# Altium PCB MasterBoardRevC.PcbDoc
Units mm, origin at the board's own origin, x right, y up, seen from the top; angles counter-clockwise.
Board outline 110.13 x 80.67 mm, 4 copper layers (Top Layer, GROUND, POWER, Bottom Layer), stack 0.603 mm thick; 93 components, 61 nets, 312 pads, 60 vias.
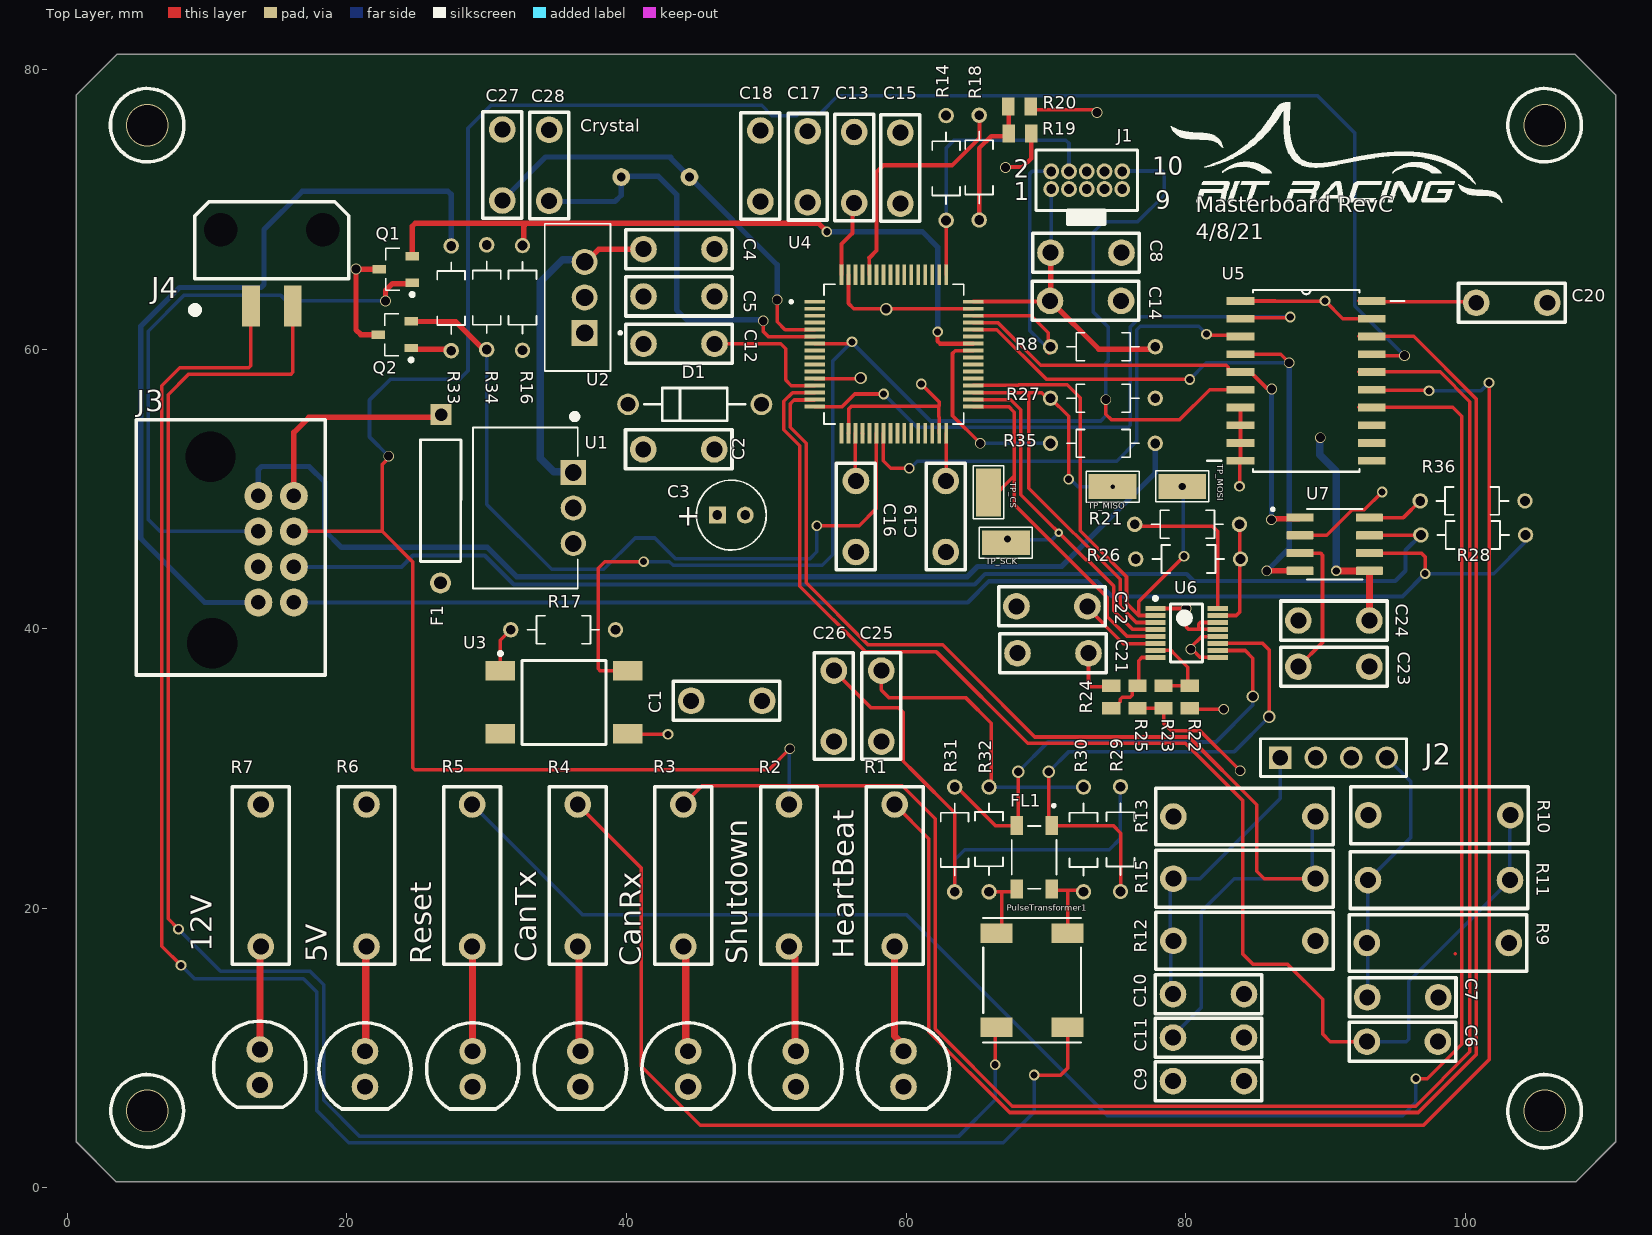
[diagram p0: Top Layer view]
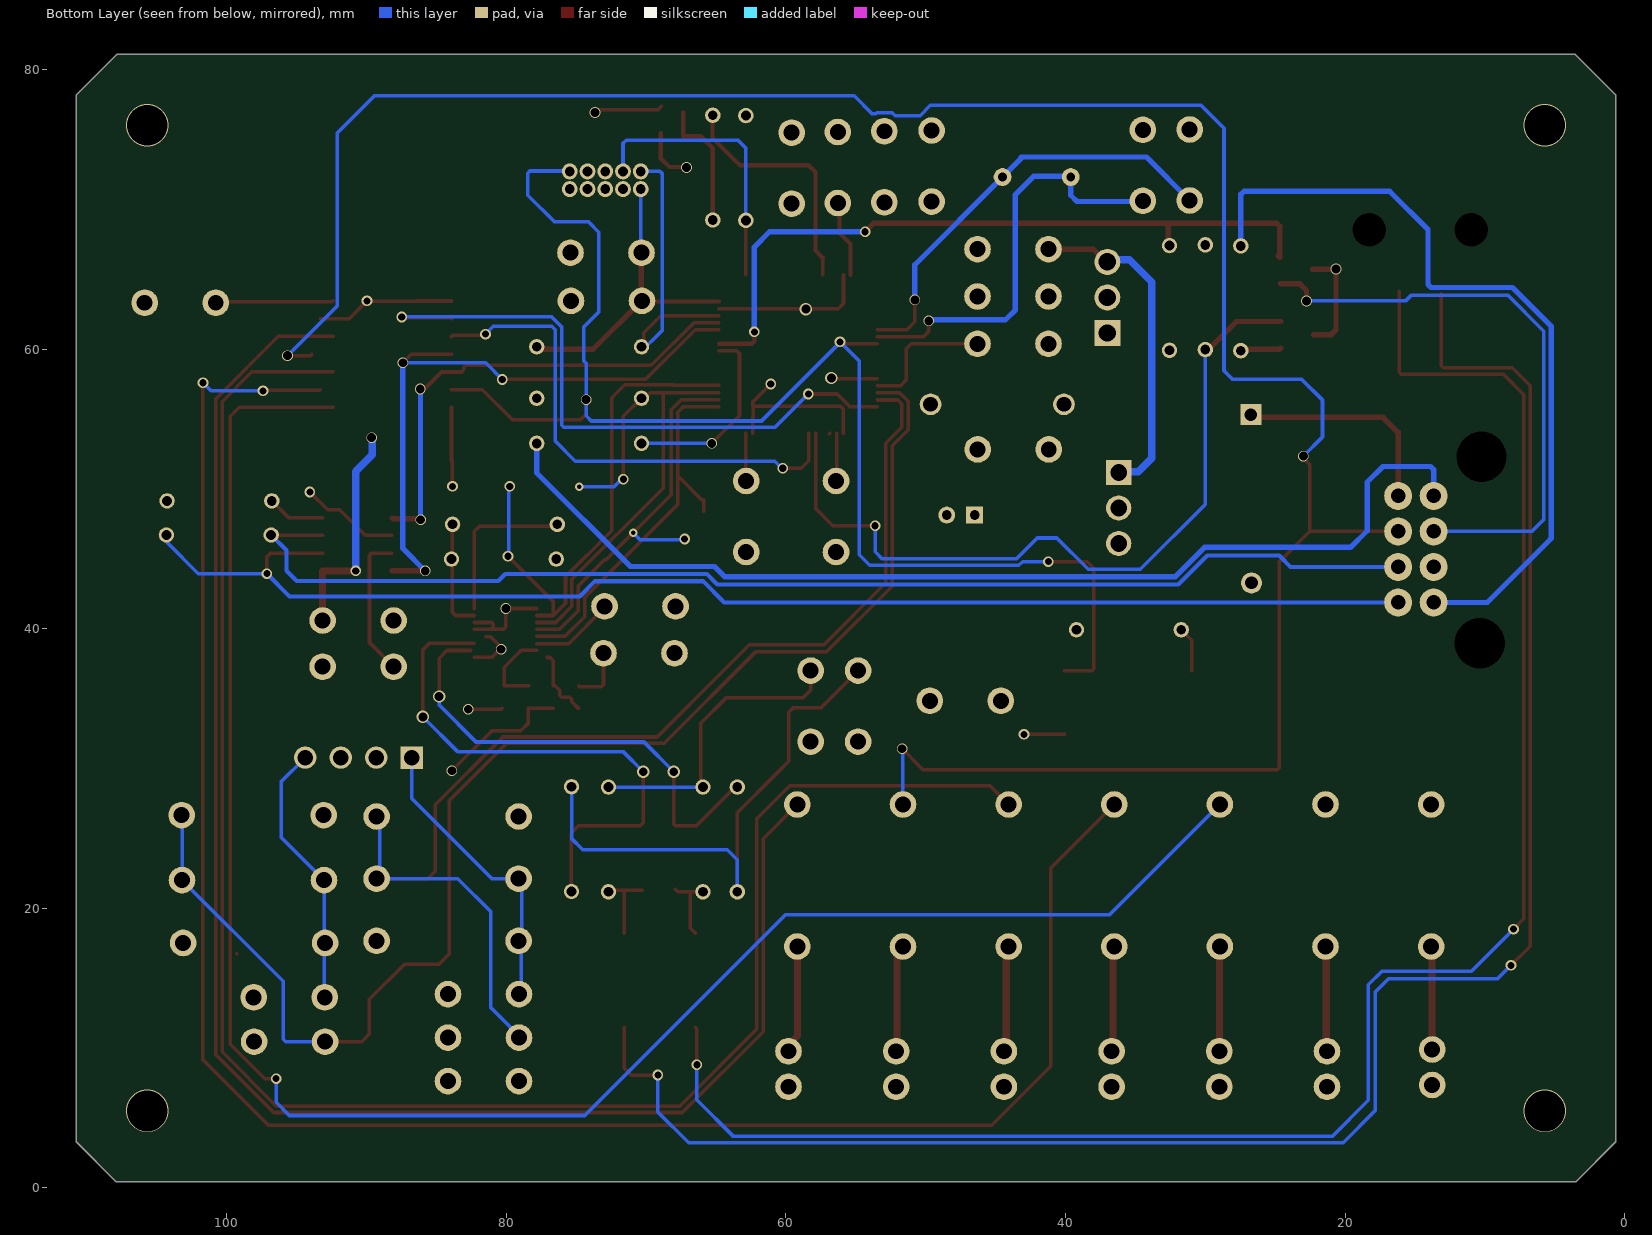
[diagram p1: Bottom Layer view, seen from below]
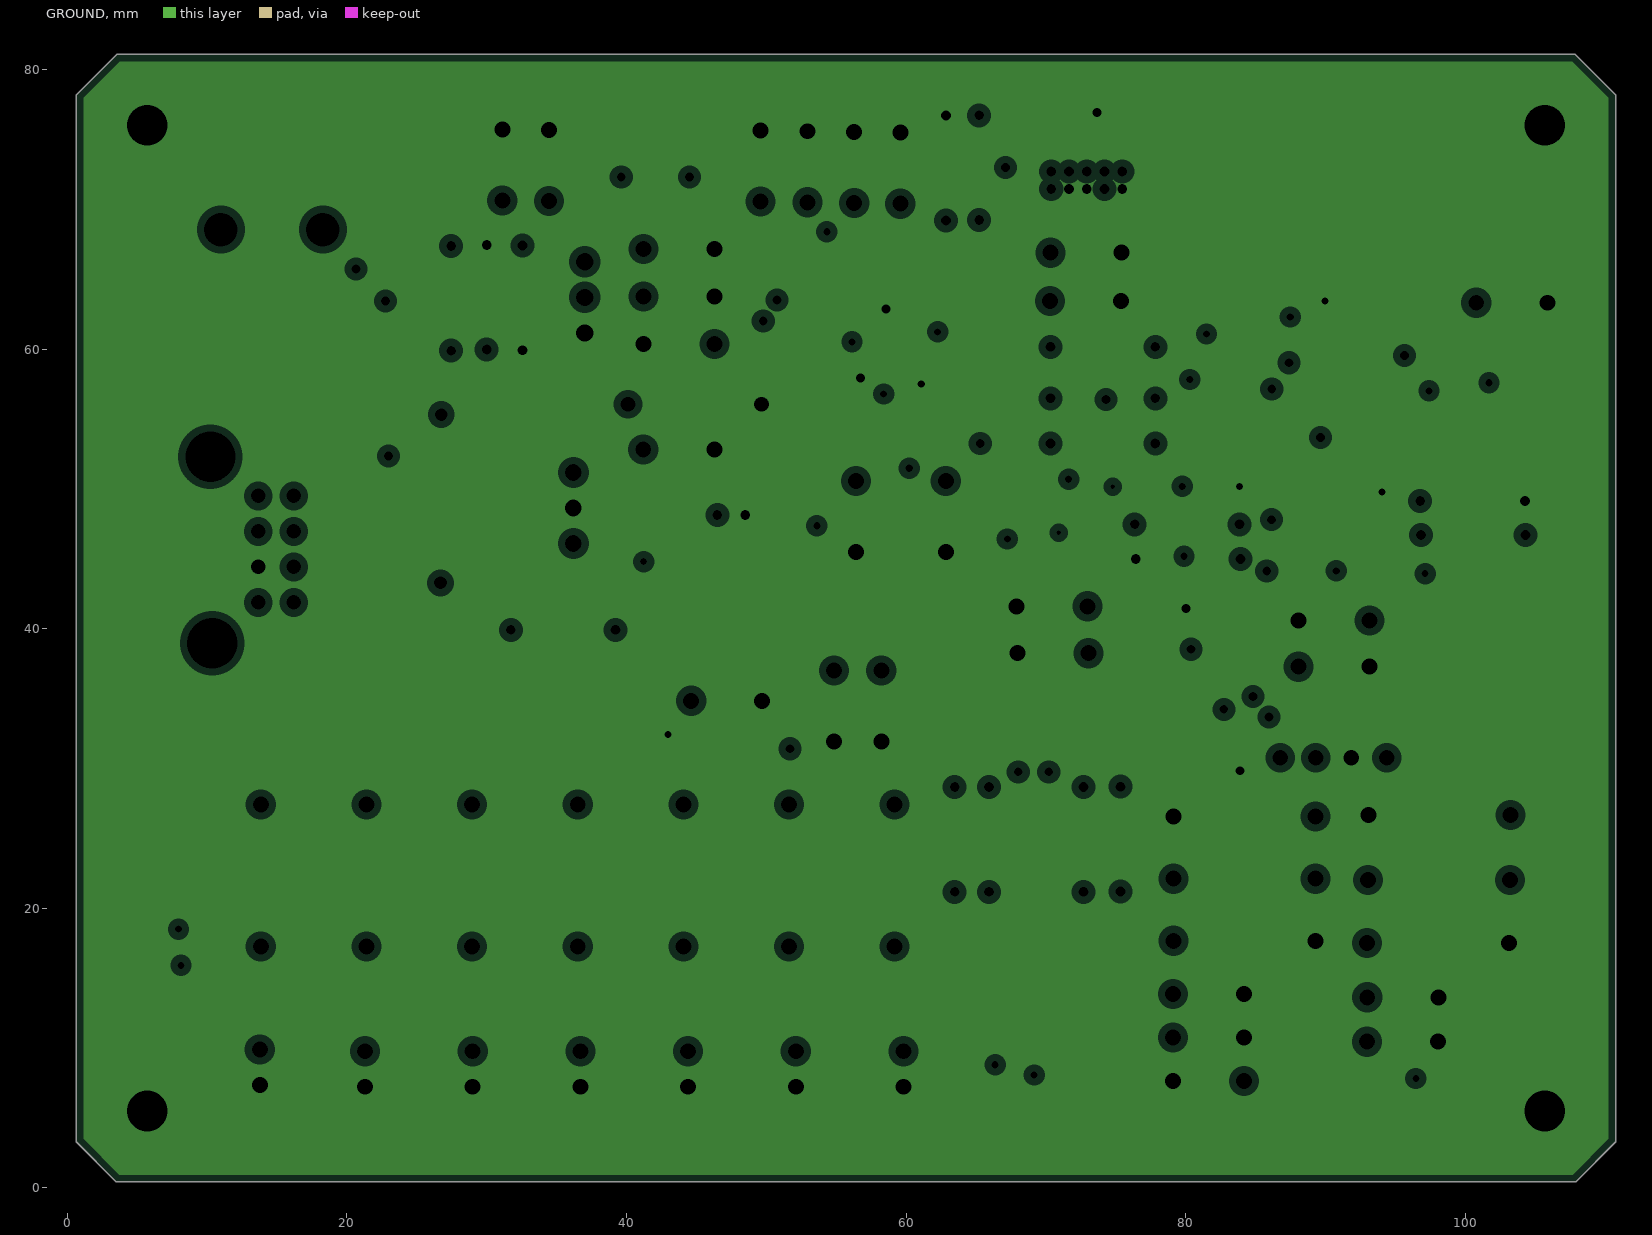
[diagram p2: GROUND, clearances drawn from the general rule]
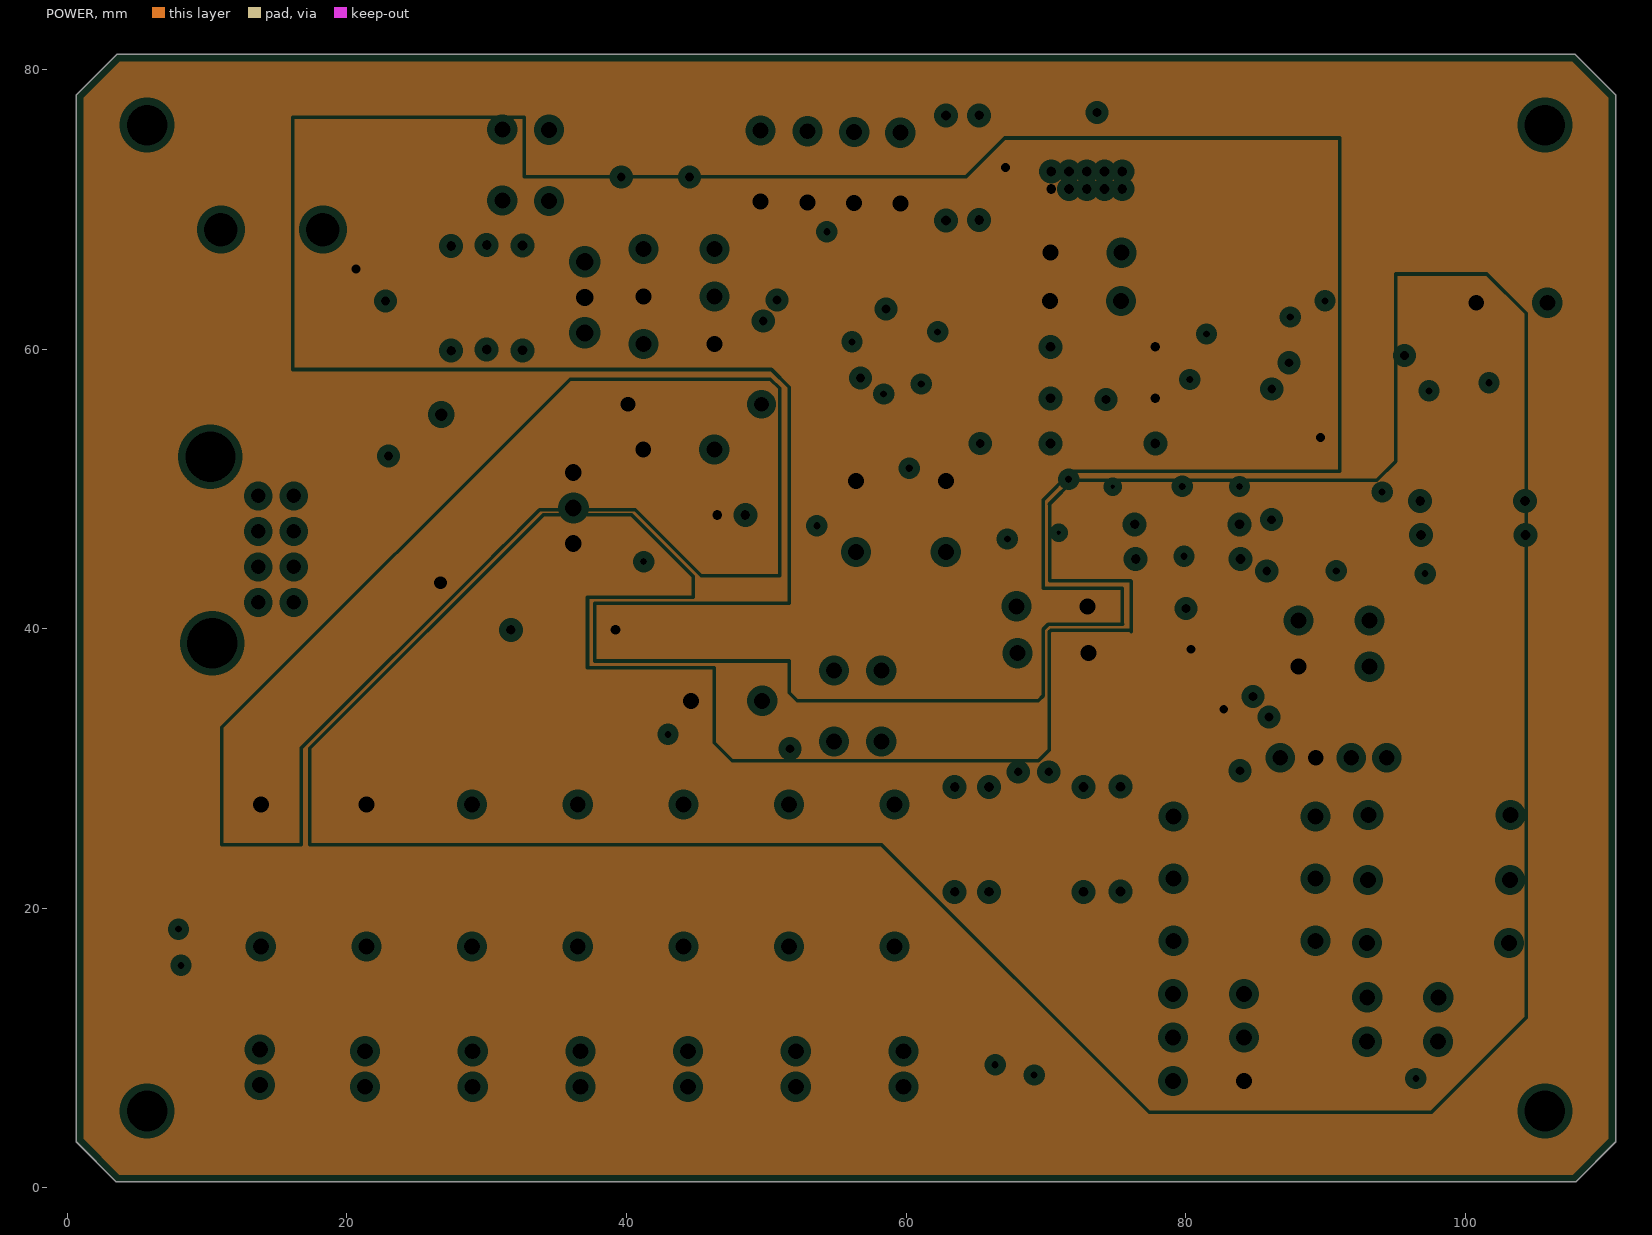
[diagram p3: POWER, clearances drawn from the general rule]

## Layer stack, top to bottom
Top Solder: solder mask 0.0102, Solder Resist, Dk 3.5
Top Layer: signal copper 0.0356
Dielectric 2: prepreg 0.0711, PP-006, Dk 4.1
GROUND: plane copper 0.035, net GND
Dielectric 1: dielectric 0.32, FR-4, Dk 4.8
POWER: plane copper 0.035, net (Multiple Nets)
Dielectric 3: prepreg 0.0711, PP-006, Dk 4.1
Bottom Layer: signal copper 0.0356
Bottom Solder: solder mask 0.0102, Solder Resist, Dk 3.5

## Board outline
0.635,3.302 0.635,78.181 3.556,81.102 107.848,81.102 110.769,78.181 110.769,3.302 107.899,0.432 3.505,0.432

## Design rules (kind name [scope] priority, off if disabled: settings)
Clearance [All] p1: gap=0.2 ignorepadtopadclearanceinfootprint=TRUE except(0.127: Arc-Arc Arc-Track Arc-SMDPad Track-Track Track-SMDPad SMDPad-SMDPad; 0.254: Via-Via)
HoleSize [All] p1: absolutevalues=TRUE maxlimit=5.08 minlimit=0.025 maxpercent=80.000 minpercent=20.000
PlaneClearance [All] p1: clearance=0.508
PlaneConnect [All] p1: planeconnectstyle=Relief reliefexpansion=0.508 reliefentries=4 reliefconductorwidth=0.254 reliefairgap=0.254
PolygonConnect [All] p1: connectstyle=Relief reliefconductorwidth=0.254 reliefentries=4 polygonreliefangle="90 Angle" airgapwidth=0.254
RoutingVias [All] p1: holewidth=0.711 width=1.27 viastyle="Through Hole" minholewidth=0.711 minwidth=1.27 maxholewidth=0.711 maxwidth=1.27
SilkToSilkClearance [All] p1: silktosilkclearance=0.102
SilkToSolderMaskClearance [IsPad] p1: minsilkscreentomaskgap=0.127 clearancetoexposedcopper=TRUE
SolderMaskExpansion [All] p1: expansion=0.102 istentingtop=FALSE
Width [All] p1: maxlimit=0.635 minlimit=0.203 preferedwidth=0.254 minimp=50.000000 maximp=50.000000 favimp=50.000000
25 further rules are at their usual default settings.

## Classes and differential pairs
component class CONNECTORS: C6 C7 C8 C9 C10 C11 J1 J2 J3 J4 Q1 Q2 R8 R9 R10 R11 R12 R13 R14 R15 R16 R17 R33 R34 R35 U3
component class PROCESSOR: C12 C13 C14 C15 C16 C17 C18 C19 C20 C27 C28 Crystal R18 R19 R20 TP_CS TP_MISO TP_MOSI TP_SCK U4 U5
component class POWER: 5V 12V C1 C2 C3 C4 C5 CanRx CanTx D1 F1 HeartBeat R1 R2 R3 R4 R5 R6 R7 Reset Shutdown U1 U2
component class COMMUNICATIONS: C21 C22 C23 C24 C25 C26 FL1 PulseTransformer1 R21 R22 R23 R24 R25 R26 R27 R28 R29 R30 R31 R32 R36 U6 U7

## Components (designator, comment, footprint, x,y, rotation, side; value= is the part's Value field where it differs from the comment)
5V "5V" "LED, TH" 21.294,8.509 r270 top value=Value? (schematic designator D7)
12V "12V_FUSED" "LED, TH" 13.767,8.636 r270 top value=Value? (schematic designator D8)
C1 "10uF" "Cap, 5mm TH, Ceramic" 47.168,34.849 r180 top value=Value?
C2 "10uF" "Cap, 5mm TH, Ceramic" 43.739,52.832 r180 top value=Value?
C3 "10uF" CAPPRD200W50D550H1250 47.498,48.133 r0 top value=Value?
C4 "10uF" "Cap, 5mm TH, Ceramic" 43.755,67.158 r180 top value=Value?
C5 "10uF" "Cap, 5mm TH, Ceramic" 43.755,63.77 r180 top value=Value?
C6 "0.68uF" "Cap, 5mm TH, Ceramic" 95.504,10.465 r0 top value=Value?
C7 "10nF" "Cap, 5mm TH, Ceramic" 95.529,13.64 r0 top value=Value?
C8 "500nF" "Cap, 5mm TH, Ceramic" 72.873,66.904 r180 top value=Value?
C9 "47uF" "Cap, 5mm TH, Ceramic" 81.636,7.645 r0 top value=Value?
C10 "10nF" "Cap, 5mm TH, Ceramic" 81.636,13.868 r180 top value=Value?
C11 "0.68uF" "Cap, 5mm TH, Ceramic" 81.636,10.757 r180 top value=Value?
C12 "100nF" "Cap, 5mm TH, Ceramic" 43.755,60.382 r0 top value=Value?
C13 "100nF" "Cap, 5mm TH, Ceramic" 56.286,73 r270 top value=Value?
C14 "100nF" "Cap, 5mm TH, Ceramic" 72.838,63.455 r180 top value=Value?
C15 "4.7uF" "Cap, 5mm TH, Ceramic" 59.588,72.949 r270 top value=Value?
C16 "10nF" "Cap, 5mm TH, Ceramic" 56.413,48.031 r90 top value=Value?
C17 "1uF" "Cap, 5mm TH, Ceramic" 52.959,73.05 r270 top value=Value?
C18 "4.7uF" "Cap, 5mm TH, Ceramic" 49.581,73.101 r270 top value=Value?
C19 "100nF" "Cap, 5mm TH, Ceramic" 62.84,48.031 r90 top value=Value?
C20 "100nF" "Cap, 5mm TH, Ceramic" 103.327,63.322 r180 top value=Value?
C21 "10nF" "Cap, 5mm TH, Ceramic" 70.51,38.252 r0 top value=Value?
C22 "10nF" "Cap, 5mm TH, Ceramic" 70.434,41.605 r0 top value=Value?
C23 "100nF" "Cap, 5mm TH, Ceramic" 90.602,37.287 r180 top value=Value?
C24 "100nF" "Cap, 5mm TH, Ceramic" 90.602,40.589 r0 top value=Value?
C25 "10nF" "Cap, 5mm TH, Ceramic" 58.229,34.468 r270 top value=Value?
C26 "100nF" "Cap, 5mm TH, Ceramic" 54.839,34.468 r270 top value=Value?
C27 "18pF" "Cap, 5mm TH, Ceramic" 31.115,73.177 r270 top value=Value?
C28 "18pF" "Cap, 5mm TH, Ceramic" 34.468,73.152 r270 top value=Value?
CanRx "CANRX" "LED, TH" 44.408,8.509 r270 top value=Value? (schematic designator D4)
CanTx "CANTX" "LED, TH" 36.703,8.509 r270 top value=Value? (schematic designator D5)
Crystal "48MHz" CrystalOscillator 42.064,72.314 r0 top
D1 "MUR180ERLG" ONSC-AXIAL_LEAD-2-59-10_P 44.882,56.058 r0 top
F1 "2A" "FUSE 20MM" 26.822,49.301 r270 top
FL1 "ACT45B-220-2P-TL003" FIL_ACT45B-220-2P-TL003 69.164,23.647 r270 top
HeartBeat "HRTBT" "LED, TH" 59.817,8.509 r270 top value=Value? (schematic designator D2)
J1 "SAMTEC-FTSH-105-01-X-D" SAMTEC-FTSH-105-01-X-D 72.923,72.085 r0 top
J2 "4pin Header" 61300411121 90.576,30.785 r0 top
J3 "30700-5080" 30700-5080 14.935,45.695 r90 top
J4 "43650-0209" 43650-0209 14.63,68.555 r180 top
PulseTransformer1 "PE-68386NLT" PE-68386NL_PUL 69.012,14.859 r270 top
Q1 "SSM3K329R,LF" SOT23-3 23.495,65.71 r180 top
Q2 "SSM3K329R,LF" SOT23-3 23.419,61.036 r180 top
R1 "Value?" "Resistor, TH" 59.182,22.352 r90 top
R2 "Value?" "Resistor, TH" 51.625,22.352 r90 top
R3 "Value?" "Resistor, TH" 44.069,22.352 r90 top
R4 "Value?" "Resistor, TH" 36.512,22.352 r90 top
R5 "Value?" "Resistor, TH" 28.956,22.352 r90 top
R6 "Value?" "Resistor, TH" 21.399,22.352 r90 top
R7 "Value?" "Resistor, TH" 13.843,22.352 r90 top
R8 "100k" "RESAD640W45L370D200 - duplicate" 74.016,60.173 r0 top value=Value?
R9 "12K" "Resistor, TH" 98.044,17.526 r180 top value=Value?
R10 "3.09K" "Resistor, TH" 98.146,26.67 r0 top value=Value?
R11 "1.60K" "Resistor, TH" 98.12,22.022 r180 top value=Value?
R12 "12K" "Resistor, TH" 84.201,17.678 r0 top value=Value?
R13 "3.09K" "Resistor, TH" 84.201,26.568 r180 top value=Value?
R14 "100k" "RESAD640W45L370D200 - duplicate" 62.865,73.025 r270 top value=Value?
R15 "1.60k" "Resistor, TH" 84.201,22.123 r180 top value=Value?
R16 "10k" "1/4W TH Resistor" 32.563,63.602 r90 top value=Value?
R17 "10k" "RESAD640W45L370D200 - duplicate" 35.408,39.929 r0 top value=Value?
R18 "2k" "1/4W TH Resistor" 65.227,72.923 r90 top value=Value?
R19 "0805 jumper" RESC2013X60X35LL20T20 68.148,75.438 r0 top
R20 "0805 jumper" RESC2013X60X35LL20T20 68.123,77.368 r180 top
R21 "806r .1%" "1/4W TH Resistor" 80.035,47.473 r0 top value=Value?
R22 "0805 jumper" RESC2013X60X35LL20T20 80.289,35.128 r270 top
R23 "0805 jumper" RESC2013X60X35LL20T20 78.418,35.128 r270 top
R24 "0805 jumper" RESC2013X60X35LL20T20 74.676,35.128 r90 top
R25 "0805 jumper" RESC2013X60X35LL20T20 76.547,35.128 r270 top
R26 "1.21k .1%" "1/4W TH Resistor" 80.112,44.983 r0 top value=Value?
R27 "2k" "1/4W TH Resistor" 74.016,56.49 r0 top value=Value?
R28 "120r" "RESAD640W45L370D200 - duplicate" 100.635,46.711 r180 top value=Value?
R29 "62r" "RESAD640W45L370D200 - duplicate" 75.336,25.019 r270 top value=Value?
R30 "300r" "RESAD640W45L370D200 - duplicate" 72.695,24.994 r270 top value=Value?
R31 "62r" "RESAD640W45L370D200 - duplicate" 63.475,24.994 r270 top value=Value?
R32 "300r" "RESAD640W45L370D200 - duplicate" 65.938,24.867 r90 top value=Value?
R33 "160r" "1/4W TH Resistor" 27.457,63.576 r90 top value=Value?
R34 "10K" "1/4W TH Resistor" 29.997,63.779 r270 top value=Value?
R35 "160r" "1/4W TH Resistor" 74.016,53.264 r0 top value=Value?
R36 "10k" "1/4W TH Resistor" 100.584,49.149 r180 top value=Value?
Reset "RESET" "LED, TH" 28.998,8.509 r270 top value=Value? (schematic designator D6)
Shutdown "SHUTDOWN" "LED, TH" 52.112,8.509 r270 top value=Value? (schematic designator D3)
TP_CS "5015" 5015 65.888,49.759 r90 top
TP_MISO "5015" 5015 74.778,50.165 r180 top
TP_MOSI "5015" 5015 79.756,50.19 r180 top
TP_SCK "5015" 5015 67.132,46.152 r180 top
U1 "VXO7805-1000" CONV_VXO7805-1000 36.195,51.181 r270 top
U2 "LM1117T-3.3" TO254P1054X470X1955-3 37.008,63.703 r90 top
U3 "Reset Button" TECO-FSM4JSMA_V 35.531,34.732 r90 top
U4 "STM32F091RCT6" *QFP50P1200X1200X160-64N 59.122,59.645 r0 top
U5 "74ACT541SC" SOIC127P1032X265-20N 88.621,57.734 r0 top
U6 "LTC6820IMS#TRPBF" TSSOP50P490X110-16N 80.061,39.7 r0 top
U7 "NXP CAN Transceiver" "NXP CAN Tranceiver" 90.662,46.05 r0 top

## Footprints (in the part's own frame and the unit in brackets; to place one, negate y for a bottom-side part, rotate by r counter-clockwise, add the part's x,y. Pads: shape width x height; smd on the part's side, far side on the other; paste and mask are expansions set on the pad)
"1/4W TH Resistor" [mm] "Axial Through Hole Resistor"
  round 1.1 hole 0.7: 1(-3.683,0) 2(3.81,0)
  silkscreen extent -2.5,-1 2.65,1, body extent -3.92,-1.12 3.98,1.03, height 2.17
5015 [mm] "SMD Test Point"
  rect 3.43x1.78 smd: 1(0,0)
  silkscreen extent -1.9,-1.1 1.9,1.1, body extent -1.27,-0.51 1.4,0.51, height 1.52
30700-5080 [mm]
  round 2 hole 1.04: 1(3.81,-1.27) 2(1.27,-1.27) 3(-1.27,-1.27) 4(-3.81,-1.27) 5(3.81,1.27) 6(1.27,1.27) 7(-1.27,1.27) 8(-3.81,1.27)
  round 0 hole 3.6 unplated: ""(-6.731,4.572)
  round 3 hole 3.6 unplated: ""(6.604,4.699)
  silkscreen extent -9,-3.5 9.25,10, body extent -9.1,-9.96 9.05,8.84, height 22.04
43650-0209 [mm] "Molex 2 Position Board Header, Right Angle"
  rect 1.27x2.92 smd: 1(1.5,5.47) 2(-1.5,5.47)
  round 0 hole 2.41 unplated: ""(-3.65,0) ""(3.65,0)
  silkscreen extent -5.5,-2 5.7,5.95, body extent -4.82,-4.6 4.83,6.14, height 5.64
61300411121 [mm]
  rect 1.6x1.6 hole 1.1: 1(-3.81,0)
  round 1.6 hole 1.1: 2(-1.27,0) 3(1.27,0) 4(3.81,0)
  silkscreen extent -5.23,-1.35 5.23,1.35, body extent -5.08,-1.27 5.08,1.27, height 8.57
*QFP50P1200X1200X160-64N [mm]
  rect 1.47x0.28 smd: 1(-5.67,3.75) 2(-5.67,3.25) 3(-5.67,2.75) 4(-5.67,2.25) 5(-5.67,1.75) 6(-5.67,1.25) 7(-5.67,0.75) 8(-5.67,0.25) 9(-5.67,-0.25) 10(-5.67,-0.75) 11(-5.67,-1.25) 12(-5.67,-1.75) 13(-5.67,-2.25) 14(-5.67,-2.75) 15(-5.67,-3.25) 16(-5.67,-3.75) 33(5.67,-3.75) 34(5.67,-3.25) 35(5.67,-2.75) 36(5.67,-2.25) 37(5.67,-1.75) 38(5.67,-1.25) 39(5.67,-0.75) 40(5.67,-0.25) 41(5.67,0.25) 42(5.67,0.75) 43(5.67,1.25) 44(5.67,1.75) 45(5.67,2.25) 46(5.67,2.75) 47(5.67,3.25) 48(5.67,3.75)
  rect 0.28x1.47 smd: 17(-3.75,-5.67) 18(-3.25,-5.67) 19(-2.75,-5.67) 20(-2.25,-5.67) 21(-1.75,-5.67) 22(-1.25,-5.67) 23(-0.75,-5.67) 24(-0.25,-5.67) 25(0.25,-5.67) 26(0.75,-5.67) 27(1.25,-5.67) 28(1.75,-5.67) 29(2.25,-5.67) 30(2.75,-5.67) 31(3.25,-5.67) 32(3.75,-5.67) 49(3.75,5.67) 50(3.25,5.67) 51(2.75,5.67) 52(2.25,5.67) 53(1.75,5.67) 54(1.25,5.67) 55(0.75,5.67) 56(0.25,5.67) 57(-0.25,5.67) 58(-0.75,5.67) 59(-1.25,5.67) 60(-1.75,5.67) 61(-2.25,5.67) 62(-2.75,5.67) 63(-3.25,5.67) 64(-3.75,5.67)
  silkscreen extent -7.44,-5 5,5, body extent -6,-6 6,6, height 1.56
"Cap, 5mm TH, Ceramic" [mil] "Through Hole Cap, Ceramic"
  round 75 hole 45: 1(-100,0) 2(100,0)
  silkscreen extent -150,-55 150,55, body extent -109,-59 109,59, height 176
CAPPRD200W50D550H1250 [mm]
  rect 1.208x1.208 hole 0.7: 1(-1,0)
  round 1.208 hole 0.7: 2(1,0)
  silkscreen extent -2.5,-2.5 2.5,2.5, body extent -2.65,-2.72 2.61,2.52, height 11.01
CONV_VXO7805-1000 [mm]
  rect 1.8x1.8 hole 1.2: 1(0,0)
  round 1.8 hole 1.2: 2(2.54,0) 3(5.08,0)
  silkscreen extent -4.2,-7.18 8.29,0.32, body extent -3.12,-6.76 8.38,0.32, height 17.5
CrystalOscillator [mm]
  round 1.27 hole 0.635: 1(-2.44,0) 2(2.44,0)
  body extent -5.55,-2.32 5.5,2.33, height 3.5
FIL_ACT45B-220-2P-TL003 [mm]
  rect 1.35x0.9 smd: 1(-2.275,1.25) 2(-2.275,-1.25) 3(2.275,-1.25) 4(2.275,1.25)
  silkscreen extent -3.8,-1.6 2.25,1.6
"FUSE 20MM" [mm]
  rect 1.5x1.5 hole 0.9: 1(-6.02,-0.076)
  round 1.5 hole 0.9: 2(6.02,-0.127)
  silkscreen extent -4.22,-1.58 4.5,1.35
"LED, TH" [mil] "Through Hole LED"
  round 75 hole 45: 1(-50,0) 2(50,0)
  silkscreen extent -130,-130 113,130, body extent -118,-118 98,118, height 346
"NXP CAN Tranceiver" [mm]
  rrect25% 1.95x0.59 smd: 1(-2.48,1.905) 2(-2.48,0.635) 3(-2.48,-0.635) 4(-2.48,-1.905) 5(2.48,-1.905) 6(2.48,-0.635) 7(2.48,0.635) 8(2.48,1.905)
  silkscreen extent -4.53,-2.52 2,2.59, body extent -2.87,-2.45 3.13,2.45, height 1.75
ONSC-AXIAL_LEAD-2-59-10_P [mm] "AXIAL, 2-Leads, Diameter 2.35mm"
  round 1.55 hole 1.05: 1(-4.77,0) 2(4.77,0)
  silkscreen extent -3.59,-1.17 3.59,1.17
PE-68386NL_PUL [mil]
  rect 55x90 smd: 1(-132.5,100) 2(-132.5,-100) 3(132.5,-100) 4(132.5,100)
  silkscreen extent -175,-138 175,138, body extent 0,0 10,10, height 10
"RESAD640W45L370D200 - duplicate" [mm] "Axial Through Hole Resistor"
  round 1.1 hole 0.7: 1(-3.683,0) 2(3.81,0)
  silkscreen extent -2.5,-1 2.65,1, body extent -3.92,-1.12 3.98,1.03, height 2.17
RESC2013X60X35LL20T20 [mm] "Chip Resistor, 2-Leads, Body 2.2x1.4mm, IPC High Density"
  rect 0.9x1.3 smd: 1(-0.8,0) 2(0.8,0)
  body extent -1.1,-0.7 1.1,0.7, height 0.6
"Resistor, TH" [mil] "Axial Through Hole Resistor"
  round 75 hole 45: 1(-200,0) 2(200,0)
  silkscreen extent -250,-80 250,80, body extent -211,-51 211,51, height 106
SAMTEC-FTSH-105-01-X-D [mil]
  round 45 hole 27.95: 1(-100,-25) 2(-100,25) 3(-50,-25) 4(-50,25) 5(0,-25) 6(0,25) 7(50,-25) 8(50,25) 9(100,-25) 10(100,25)
  silkscreen extent -143,-85 143,85, body extent -125,-67 125,68, height 219
SOIC127P1032X265-20N [mil]
  rect 78x22 smd: 1(-185,225) 2(-185,175) 3(-185,125) 4(-185,75) 5(-185,25) 6(-185,-25) 7(-185,-75) 8(-185,-125) 9(-185,-175) 10(-185,-225) 11(185,-225) 12(185,-175) 13(185,-125) 14(185,-75) 15(185,-25) 16(185,25) 17(185,75) 18(185,125) 19(185,175) 20(185,225)
  silkscreen extent -279,-256 277,256
SOT23-3 [mm] "SOT23, 3-Leads, Body 2.90x2.40mm, Pitch 0.95mm, IPC Medium Density"
  rect 0.95x0.6 smd: 1(-1.175,0.95) 2(-1.175,-0.95) 3(1.175,0)
  silkscreen extent -1.3,-1.5 0.7,1.92, body extent -1.42,-1.5 1.42,1.5, height 1.2
TECO-FSM4JSMA_V [mm] "SMD, 4-Leads, Body 6x6mm, Pitch 4.5mm"
  rect 1.4x2.1 smd: 1(2.25,4.55) 2(2.25,-4.55) 3(-2.25,4.55) 4(-2.25,-4.55)
  silkscreen extent -3,-3 3.62,4.67, body extent -3,-5 3,5, height 5.08
TO254P1054X470X1955-3 [mm]
  rect 1.86x1.86 hole 1.24: 1(-2.54,0)
  round 1.86 hole 1.24: 2(0,0) 3(2.54,0)
  silkscreen extent -5.27,-2.64 5.27,2.86
TSSOP50P490X110-16N [mm] "TSSOP, 16-Leads, Body 3.77x3.00mm, Pitch 0.50mm, IPC Medium Density"
  rect 1.45x0.35 smd: 1(-2.225,1.75) 2(-2.225,1.25) 3(-2.225,0.75) 4(-2.225,0.25) 5(-2.225,-0.25) 6(-2.225,-0.75) 7(-2.225,-1.25) 8(-2.225,-1.75) 9(2.225,-1.75) 10(2.225,-1.25) 11(2.225,-0.75) 12(2.225,-0.25) 13(2.225,0.25) 14(2.225,0.75) 15(2.225,1.25) 16(2.225,1.75)
  silkscreen extent -2.35,-2.08 1.15,2.6, body extent -1.55,-2.05 1.55,2.05, height 1.1

## Part data
5V 12V CanRx CanTx HeartBeat Reset Shutdown: library part "LED, TH", "LED, 5mm, TH", Published=22Oct2016, Publisher=T.Tallo, Status=Active, TargetLibrary=RITRacing-LED's
C1 C2 C4 C5 C6 C7 C8 C9 C10 C11 C12 C13 C14 C15 C16 C17 C18 C19 C20 C21 C22 C23 C24 C25 C26 C27 C28: library part "Cap, 5MM TH, Ceramic", "Generic Cap, 5MM TH, Ceramic", Published=22Oct2016, Publisher=T.Tallo, Status=Active, TargetLibrary=RITRacing-Passives
C3: library part "Cap, TH, Electrolytic_5mm", "Generic Cap, TH, Electrolytic", Published=22Oct2016, Publisher=T.Tallo, Status=Active, TargetLibrary=RITRacing-Passives
Crystal: library part CrystalOscillator
D1: library part CMP-0902-00111-1, "SWITCHMODE(TM) Power Rectifier, Ultrafast 'E' Series with High Reverse Energy Capability, 2-Pin Axial_Lead, Pb-Free, Tape and Reel", Manufacturer="On Semiconductor", ComponentLink1Description="Manufacturer URL", ComponentLink1URL=http://www.onsemi.com/, ComponentLink2Description=Datasheet, ComponentLink2URL=http://www.onsemi.cn/pub_link/Collateral/MUR180E-D.PDF, ComponentLink3Description="Package Specification", ComponentLink3URL=http://www.onsemi.cn/pub_link/Collateral/59-10.PDF, DatasheetVersion="Rev. 4", IFSM Max (A)=35, Mounting Technology="Through Hole", PackageDescription="2-Pin, Axial Lead, Diameter 2.35 mm", PackageReference=AXIAL_LEAD-2-59-10, PackageVersion="Rev. U, 02/2005", Packing="Tape and Reel", PartNumber=MUR180ERLG, RoHS=TRUE, Type=Ultrafast
F1: library part "Fuse 2", "Fuse", LatestRevisionDate=17-Jul-2002, LatestRevisionNote="Re-released for DXP Platform.", PackageDescription="Thru-Hole; 2 Leads", PackageReference=PIN-W2/E2.8, Published=8-Jun-2000, Publisher="Altium Limited"
FL1: "100ÂµH @ 100kHz 2 Line Common Mode Choke Surface Mount 5.8 kOhms @ 10MHz 150mA DCR 2Ohm", Package=None, Availability=Unavailable, MP=ACT45B-220-2P-TL003, Price=None
J1: "Connector Header Through Hole 10 position 0.050\" _1.27mm_", Package=None, Availability=Unavailable, MF=Samtec, MP=FTSH-105-01-F-D, Price=None, SnapEDA_Link=https://www.snapeda.com/parts/FTSH-105-01-F-D/Samtec%20Inc./view-part/105348/?ref=snap
J2: library part CMP-1502-01064-1, "THT Vertical Pin Header WR-PHD, Pitch 2.54 mm, Single Row, 4 pins", Contact Resistance=20mOhm, Manufacturer="Wurth Elektronik", Manufacturer Part Number=61300411121, Operating Temperature=-40to105degC, Rated Current=3A, Withstanding Voltage=500VAC, Working Voltage=250VAC, Datasheet URL=https://katalog.we-online.de/em/datasheet/6130xx11121.pdf, Gender=Male, Manufacturer URL=http://www.we-online.de, Mounting Technology=THT, Orientation=Vertical, Package Reference=61300411121, Packaging=Bag, Part Number=61300411121, Pin Number=4, Pitch=2.54mm, Publisher=WurthElektronik, Row Number=Single
J3: "Molex 8 Position High Density Board Header", Manufacturer=Molex, ComponentLink1Description=Datasheet, ComponentLink1URL=http://www.molex.com/molex/products/datasheet.jsp?part=active/0307004081_PCB_HEADERS.xml, PartNumber=30700-5080, Published=22Oct2016, Publisher=T.Tallo, Status=Active, TargetLibrary=RITRacing-Connectors
J4: "Molex 2 Position Board Header, RIght Angle", Manufacturer=Molex, Voltage=600V, ComponentLink1Description=Datasheet, ComponentLink1URL=http://www.mouser.com/ds/2/418/NG_CD_1445088_A1-614413.pdf, PartNumber=43650-0209, Published=13Aug2018, Publisher=T.Tallo, Status=Active, TargetLibrary=RITRacing-Connectors
PulseTransformer1: "No Description Available", Built_By=EMA_Cory, Copyright="Copyright (C) 2018 Accelerated Designs. All rights reserved", Manufacturer_Part_Number=PE-68386NLT, RefDes=RefDes, SourceLibrary=Pulse_Electronics_2019-12-18, Type=DEV, Vendor="Pulse Electronics Corporation"
Q1 Q2: "N-Channel MOSFET, 30V, 3.5A", Manufacturer=Toshiba, ComponentLink1Description=Datasheet, ComponentLink1URL="See Digikey", PartNumber=SSM3K329R,LF, Published=09/27/2017, Publisher=T.Tallo, Status=Active, TargetLibrary=RITRacing-Transistors
R1 R2 R3 R4 R5 R6 R7 R8 R9 R10 R11 R12 R13 R14 R15 R16 R17 R18 R21 R26 R27 R28 R29 R30 R31 R32 R33 R34 R35 R36: library part "Resistor, TH", "Generic TH Resistor", Published=22Oct2016, Publisher=T.Tallo, Status=Active, TargetLibrary=RITRacing-Passives
R19 R20 R22 R23 R24 R25: library part CMP-2000-06973-1, "Chip Resistor, 0 Ohm, +/- 5%, 0.125 W, -55 to 155 degC, 0805 (2012 Metric) , RoHS, Tape and Reel", Manufacturer="Samsung Electro-Mechanics", Package Description="2-Pin Chip Resistor, Body 2 x 1.25 mm", Package Reference=0805, Rated Power=0.125W, Resistance=0O, Temp Coefficient=±200ppm/°C, Tolerance (%)=±5%, Datasheet URL=https://datasheet.ciiva.com/15196/getdatasheetpartid-499011-15196236.pdf, Datasheet Version=11/2010, Manufacturer URL=http://www.samsungsem.com/global/index.jsp, Mounting Technology=SurfaceMount, Size Code=0805
TP_CS TP_MISO TP_MOSI TP_SCK: "SMD Test Point", Manufacturer="Keystone Electronics", ComponentLink1Description=Datasheet, ComponentLink1URL=http://www.mouser.com/ds/2/215/005-5009-743680.pdf, PartNumber=5015, Published=22Oct2016, Publisher=T.Tallo, Status=Active, TargetLibrary=RITRacing-Connectors
U2: "800-mA 15-V linear voltage regulator 3-TO-220 0 to 125", Package="TO-220-3 Texas Instruments", Arrow_Electronics-Purchase-URL=https://snapeda.com/shop?store=Arrow+Electronics&id=22275, Availability=https://www.mouser.com/ProductDetail/Texas-Instruments/LM1117T-33-NOPB?qs=X1J7HmVL2ZF7RIQB6O0mNg%3D%3D&gclid=Cj0KCQjwvvj5BRDkARIsAGD9vlJnD1MNOYBTPv7FHDAskkwDQ_PuLBSV-edvQAne3qvGjGEuZX3qJSwaAtIgEALw_wcB, DigiKey-Purchase-URL=https://snapeda.com/shop?store=DigiKey&id=22275, MF="Texas Instruments", Mouser-Purchase-URL=https://snapeda.com/shop?store=Mouser&id=22275, MP=LM1117T-3.3/NOPB, Price=None, SnapEDA_Link=https://www.snapeda.com/parts/LM1117T-3.3/NOPB/Texas%20Instruments/view-part/22275/?ref=snap, Texas_Instruments-Purchase-URL=https://snapeda.com/shop?store=Texas+Instruments&id=22275
U3: library part CMP-2000-07488-1, "Swicth, SPST, 24 V, -35 to 85 degC, 4-Pin SMD, RoHS, Tape and Reel", Case\/Package=SMD/SMT, Contact Current Rating=50mA, Contact Resistance=100mOhm, Manufacturer="TE Connectivity", Max Operating Temperature=85degC, Max Voltage Rating (DC)=12V, Min Operating Temperature=-35degC, Operating Force=1.57N, Package Description="4-Pin Surface Mount Device, Body 6 x 6 mm, Pitch 4.5 mm", Package Quantity=750, Package Reference=FSM4JSMA, Voltage Rating=24V, Actuator Length=0.055inch, Actuator Material=Polyamide, Contact Material=CopperAlloy, Contact Plating=Silver, Current Rating=50mA, Datasheet URL=http://www.te.com/commerce/DocumentDelivery/DDEController?Action=showdoc&DocId=Customer+Drawing%7F2-1437565-7%7FV%7Fpdf%7FEnglish%7FENG_CD_2-1437565-7_V.pdf%7F4-1437565-2, Datasheet Version="Rev. V, 02/2015", Electrical Life=100000Cycles, Illumination Type=Illuminated, Length=6mm, Manufacturer URL=http://www.te.com/, Mechanical Life=100000Cycles, Mount=SurfaceMount, Mounting Technology=SurfaceMount, Orientation=Straight, Packaging=LoosePiece, REACH SVHC=Unknown, RoHSCompliant=true, Switch Travel=0.25mm, Termination=GullWing, Throw Configuration=SPST, Voltage Rating (DC)=24V, Width=6mm
U4: library part CMP-12105-000069-1, "IC MCU 32BIT 256KB FLASH 64LQFP", Ambient Temperature Range High=+85°C, Ambient Temperature Range Low=-40°C, Frequency=48MHz, Manufacturer=STMicroelectronics, Max Junction Temp=+105°C, Max Supply Voltage=3.6V, Min Supply Voltage=2V, Nominal Supply Current=0.9-26.9mA, Package=LQFP64-5W, Temperature="-40°C to +85°C", Automotive=No, Category=IC, ComponentLink2Description=Datasheet, ComponentLink2URL=https://www.st.com/resource/en/datasheet/stm32f091rc.pdf, Core Architecture="ARM Cortex-M0", Data Bus Width=32bits, Device Class L1="Integrated Circuits (ICs)", Device Class L2="Embedded Processors and Controllers", Device Class L3=Microcontrollers, Digikey Description="IC MCU 32BIT 256KB FLASH 64LQFP", Height=1.6mm, Interface=I2C,SPI,USART,CAN,LIN,IrDA,I2S,SMBus, Ipc Land Pattern Name=QFP50P1200X1200X160-64, Lead Free=Yes, Manufacturer Part Number=STM32F091RCT6, Memory Size=256KBytes, Memory Type=FLASH, Mouser Description="ARM Microcontrollers - MCU 16/32-BITS MICROS", Number Of A/D Converters=1, Number Of Adc Channels=19, Number Of Cores=1, Number Of I2C Channels=2, Number Of I/Os=52, Number Of Pwm Channels=6, Number Of Spi Channels=2, Number Of Timers/Counters=10, Number Of Uart Channels=8, Octopart=https://octopart.com/stm32f091rct6-stmicroelectronics-51988683, Ram Size=32KBytes, RoHS=TRUE, Standoff Height=0.05mm, Temperature Range High=+85°C, Temperature Range Low=-40°C
U5: "Buffer, Non-Inverting 1 Element 8 Bit per Element 3-State Output 20-SOIC", Package="SOIC-20 Fairchild Semiconductor", Arrow_Electronics-Purchase-URL=https://snapeda.com/shop?store=Arrow+Electronics&id=431052, Availability=Warning, DigiKey-Purchase-URL=https://snapeda.com/shop?store=DigiKey&id=431052, MF="ON Semiconductor", Mouser-Purchase-URL=https://snapeda.com/shop?store=Mouser&id=431052, MP=74ACT541SC, Price=None, SnapEDA_Link=https://www.snapeda.com/parts/74ACT541SC/ON%20Semiconductor/view-part/431052/?ref=snap
U6: library part CMP-0937-00011-1, "IsoSPI Isolated Communication Interface, 2.7 to 5.5 V, -40 to 85 degC, 16-Pin MSOP (MS), Pb-Free, Tape and Reel", IO Supply Current="1 uA Max.", IO Supply Voltage Range="1.7 to 5.5 V", Manufacturer="Linear Technology", Power Supply="2.7 to 5.5 V", Receiver Input Resistance="35 kOhm", Supply Current, IDLE State="2 uA", Temperature Range (degC)="-40 to 85", ComponentLink1Description="Manufacturer URL", ComponentLink1URL=http://www.linear.com/, ComponentLink2Description=Datasheet, ComponentLink2URL=http://cds.linear.com/docs/en/datasheet/6820fa.pdf, ComponentLink3Description="Package Specification", ComponentLink3URL=http://cds.linear.com/docs/en/packaging/05081669_A_MS16.pdf, DatasheetVersion="Rev. A", Manufacturer Part Number=LTC6820IMS#TRPBF, Mounting Technology="Surface Mount", PackageDescription="16-Pin Micro Small Outline Package, Body 4.039 x 3 mm, Pitch 0.5 mm", PackageReference=MS-16, PackageVersion="Rev. A", Packing="Tape and Reel", PartNumber=LTC6820IMS#TRPBF, VBIAS="1.9 to 2.1 V"

## Via types
v1: diameter 0.762, hole 0.508, Top Layer to Bottom Layer, 28 vias
v2: diameter 0.762, hole 0.635, Top Layer to Bottom Layer, 20 vias
v3: diameter 0.889, hole 0.635, Top Layer to Bottom Layer, 6 vias
v4: diameter 3.048, hole 2.921, Top Layer to Bottom Layer, 4 vias
v5: diameter 0.61, hole 0.305, Top Layer to Bottom Layer, 2 vias

## Nets (pads, with @x,y where several pads share a name; then routed paths per layer and width w, separated by ;. In a path a pad name is that pad's centre, name@x,y a point inside that pad or via, vN(x,y) a via of type N, cw(c..) or ccw(c..) an arc to the next point about the centre after c; other vN are vias at no path point)
12V_Fused: C2.2 C3.1 C4.2 D1.1 F1.2 R7.2 U1.1 U2.3 | length 24.1
  Top Layer w0.381: U2.3@37.236,66.37 38.024,67.158 C4.2 ; D1.1@39.934,56.236 D1.1 ; C2.2@41.148,52.781 C2.2
  Bottom Layer w0.508: U1.1@36.195,51.232 34.798,51.232 33.833,52.197 33.833,64.803 35.426,66.396 37.211,66.396 U2.3@37.236,66.37
AIR_Open_Sig: J3.6 Q1.1 | length 42.8
  Top Layer w0.254: Q1.1@24.599,64.689 Q1.1
  Top Layer w0.381: v2(22.758,63.449) 22.758,64.186 23.261,64.689 Q1.1@24.599,64.689
  Bottom Layer w0.254: J3.6 6.629,46.965 5.779,47.816 5.779,61.281 8.34,63.843 15.284,63.843 15.677,63.449 v2(22.758,63.449)
AIRS_Signal_NMOS: Q1.2 R16.2 U4.42 | length 51.9
  Top Layer w0.305: v1(62.255,61.239) 62.255,60.574 62.434,60.395 U4.42
  Top Layer w0.381: Q1.2@24.677,66.573 24.778,66.675 24.758,66.675 24.663,66.769 24.663,68.789 24.887,69.012 32.862,69.012 ; R16.2@32.639,67.26 32.639,68.789 32.862,69.012 ; v1(54.331,68.402) 53.721,69.012 32.862,69.012
  Bottom Layer w0.381: v1(54.331,68.402) 61.163,68.402 62.255,67.31 v1(62.255,61.239)
CANH: J3.3 R28.2 U7.7 | length 88.3
  Top Layer w0.254: U7.7 93.154,46.698 96.812,46.698 R28.2 R28.2@96.799,46.736
  Bottom Layer w0.305: J3.3 23.9,44.425 24.713,45.237 29.86,45.237 31.93,43.167 64.91,43.167 65.656,43.913 80.075,43.913 80.577,43.412 94.996,43.412 95.733,44.148 95.733,45.618 R28.2
CANL: J3.4 R28.1 U7.6 | length 96
  Top Layer w0.254: U7.6 96.85,45.415 97.13,45.136 v1(97.13,43.942)
  Bottom Layer w0.254: v1(97.13,43.942) 102.032,43.942 104.242,46.152
  Bottom Layer w0.305: J3.4 64.414,41.885 65.938,43.409 73.66,43.409 74.752,42.316 95.504,42.316 v1(97.13,43.942)
CanRx: U4.44 U5.4 U7.4 | length 46.3
  Top Layer w0.254: U4.44 66.494,61.395 70.053,57.836 v1(80.289,57.836) ; U5.4 86.792,59.639 v2(87.401,59.03) ; v2@85.776,44.12 v2(85.801,44.145)
  Top Layer w0.381: v2(85.801,44.145) U7.4
  Bottom Layer w0.254: v1(80.289,57.836) 81.483,59.03 v2(87.401,59.03)
  Bottom Layer w0.381: v2(85.801,44.145) 87.401,45.745 v2(87.401,59.03)
CanRx_FromBuff: R3.2 U5.16 | length 132
  Top Layer w0.254: R3.2 45.402,28.765 59.734,28.765 62.086,26.413 62.086,11.373 67.605,5.855 96.447,5.855 100.33,9.738 100.33,56.246 98.201,58.375 U5.16@92.396,58.375
CanTx: U4.45 U5.5 U7.1 | length 34.9
  Top Layer w0.254: U4.45 66.578,61.895 69.621,58.852 82.909,58.852 83.058,58.703 83.058,58.522 83.21,58.369 84.633,58.369 85.779,57.223 86.084,57.223 v2(86.157,57.15) ; U7.1@88.156,47.93 U7.1
  Top Layer w0.381: v2(86.131,47.803) 86.204,47.876 88.102,47.876 U7.1@88.156,47.93
  Bottom Layer w0.381: v2(86.131,47.803) 86.144,47.816 86.144,57.137 v2(86.157,57.15)
CanTx_FromBuff: R4.2 U5.15 | length 142
  Top Layer w0.254: R4.2 41.053,22.891 41.053,8.708 45.278,4.483 97.015,4.483 101.702,9.169 v1(101.702,57.603) ; U5.15 93.358,57.061 97.371,57.061 v1(97.409,57.023)
  Bottom Layer w0.254: v1(97.409,57.023) 101.122,57.023 v1(101.702,57.603)
CHANNEL1: C6.1 R10.2 R11.1 U4.14 | length 100
  Top Layer w0.254: U4.14 51.88,56.895 51.257,56.273 51.257,54.229 52.4,53.086 52.4,43.053 57.112,38.341 62.173,38.341 68.713,31.801 79.985,31.801 84.097,27.688 84.097,16.716 84.823,15.989 87.312,15.989 89.802,13.5 89.802,11.011 90.348,10.465 C6.1
  Bottom Layer w0.254: C6.1 95.783,10.465 95.961,10.643 95.961,14.783 R11.1 103.188,22.034 103.188,26.429 R10.2@103.175,26.441
CHANNEL2: C11.2 R13.1 R15.1 U4.15 | length 86.2
  Top Layer w0.254: U4.15 53.422,56.365 51.996,56.365 51.867,56.236 51.714,56.083 51.714,54.418 52.857,53.275 52.857,43.282 57.277,38.862 62.611,38.862 64.516,36.957 69.215,32.258 80.239,32.258 85.09,27.407 85.09,22.657 85.623,22.123 R15.1@89.052,22.123
  Bottom Layer w0.254: C11.2@78.969,10.757 81.102,12.89 81.102,19.761 83.464,22.123 89.052,22.123 89.052,26.568 R13.1@89.052,26.6
ChargeSignal: R35.1 U4.41 | length 13.8
  Top Layer w0.254: U4.41 63.527,59.895 63.322,59.69 63.322,55.245 v2(65.303,53.264)
  Bottom Layer w0.254: v2(65.303,53.264) R35.1
Charging: Q2.1 R33.1 | length 2.9
  Top Layer w0.381: Q2.1 24.69,59.99 27.361,59.99 R33.1
Charging: Q2.2 R34.2 U4.22 | length 56.7
  Top Layer w0.254: v1(53.619,47.371) 56.642,47.371 57.872,48.601 U4.22
  Top Layer w0.381: Q2.2 27.777,61.986 R34.2@29.997,59.766
  Bottom Layer w0.254: R34.2 29.997,48.895 34.646,44.247 38.379,44.247 40.627,46.495 42.024,46.495 43.523,44.996 53.099,44.996 53.619,45.517 v1(53.619,47.371)
GND: 5V.2 12V.2 C1.1 C2.1 C3.2 C4.1 C5.1 C6.2 C7.2 C8.1 C9.1 C10.1 C11.1 C12.1 C13.1 C14.1 C15.1 C16.1 C17.1 C18.1 C19.1 C20.1 C21.1 C22.1 C23.1 C24.1 C25.2 C26.2 C27.1 C28.1 CanRx.2 CanTx.2 D1.2 HeartBeat.2 J1.3 J1.5 J1.9 J2.3 J3.7 R9.1 R10.1 R12.2 R13.2 R14.1 R16.1 R20.1 R23.2 R25.2 R26.1 R34.1 R36.1 Reset.2 Shutdown.2 U1.2 U2.1 U3.4 U4.12 U4.18 U4.31 U4.47 U4.63 U5.1 U5.7 U5.8 U5.9 U5.10 U5.19 U6.1 U6.13 U6.14 U7.2 | length 74.9
  Top Layer w0.254: U3.4 40.045,32.446 v1(42.973,32.446) ; U4.12 56.701,57.895 v3(56.744,57.937) ; U4.18 55.885,53.988 55.885,55.707 56.109,55.931 62.332,55.931 62.357,55.956 ; U4.63 55.88,65.307 55.88,63.271 56.256,62.895 U4.47 ; v1(61.087,57.506) 62.357,56.236 62.357,55.956 ; U4.31 62.372,55.142 62.351,55.163 62.351,55.95 62.357,55.956 ; R20.1 69.151,77.14 73.319,77.14 73.523,76.937 v2(73.66,76.937) ; R25.2@76.632,34.328 R23.2@78.384,34.328 ; U6.1 80.033,41.45 v2(80.035,41.453) 80.035,40.132 80.217,39.95 81.073,39.95 ; R23.2 78.418,33.266 78.969,32.715 81.026,32.715 v2(83.896,29.845) ; U6.13 81.073,39.95 ; U6.14 81.038,40.45 80.924,40.337 80.924,40.099 81.073,39.95 ; v1(83.855,50.185) 83.855,51.952 U5.10 U5.9 U5.8 U5.7 ; U5.1 83.925,63.446 86.417,63.446 86.42,63.443 89.951,63.443 v1(89.965,63.458) 91.24,62.182 93.317,62.182 U5.19 ; U7.2 90.087,46.685 91.906,48.504 92.776,48.504 v1(94.056,49.784)
  other v3: 58.572,62.865
  other v4: 5.715,5.512 105.689,5.512 5.715,76.022 105.689,76.022
HEARTBEAT: R1.2 U5.18 | length 117.7
  Top Layer w0.254: R1.2 61.629,24.985 61.629,11.184 67.416,5.397 96.637,5.397 100.787,9.548 100.787,56.436 96.308,60.915 U5.18@92.396,60.915
HEARTBEAT_BUFF: U4.16 U5.2 | length 46.4
  Top Layer w0.254: U4.16 55.426,55.895 56.326,56.794 v1(58.395,56.794) ; U5.2 83.985,62.243 87.414,62.243 v1(87.478,62.306)
  Bottom Layer w0.254: v1(58.395,56.794) 60.782,54.407 75.899,54.407 76.048,54.556 76.048,61.592 76.762,62.306 v1(87.478,62.306)
IM: FL1.2 R31.1 U6.10 | length 33.9
  Top Layer w0.254: R31.1@63.627,28.677 66.381,25.922 FL1.2 68.021,26.029 v3(68.021,29.769) ; U6.10@82.55,38.445 84.262,38.445 84.811,37.897 v3(84.811,35.154)
  Bottom Layer w0.254: v3(68.021,29.769) 70.155,31.902 82.169,31.902 84.786,34.519 84.786,35.129 v3(84.811,35.154)
IM_Out_Connector: J4.2 PulseTransformer1.3 | length 129.6
  Top Layer w0.254: v1(7.95,18.517) 7.214,19.253 7.214,56.744 8.661,58.191 15.982,58.191 16.13,58.34 J4.2@16.13,64.148 ; v1(66.37,8.814) 66.37,11.392 PulseTransformer1.3
  Bottom Layer w0.254: v1(7.95,18.517) 10.96,15.507 17.361,15.507 18.339,14.529 18.339,6.274 20.93,3.683 63.754,3.683 66.37,6.299 v1(66.37,8.814)
IP: FL1.1 R29.2 U6.11 | length 39.4
  Top Layer w0.254: v3@70.206,29.667 70.206,26.131 FL1.1 74.814,25.922 75.362,25.375 75.362,21.234 R29.2 ; R29.2@75.057,21.107 R29.2@75.159,21.209 ; U6.11 85.51,38.95 85.979,38.481 85.979,33.706 v3(85.973,33.699)
  Bottom Layer w0.254: v3(70.206,29.769) 71.653,31.217 83.49,31.217 v3(85.973,33.699)
IP_Out_Connector: J4.1 PulseTransformer1.4 | length 134.5
  Top Layer w0.254: v1(8.128,15.926) 6.756,17.297 6.756,57.379 8.052,58.674 12.982,58.674 13.13,58.823 J4.1@13.13,63.964 ; v1(69.164,8.077) 71.069,8.077 71.552,8.56 PulseTransformer1.4
  Bottom Layer w0.254: v1(8.128,15.926) 9.093,14.961 16.891,14.961 17.831,14.021 17.831,5.537 20.142,3.226 66.954,3.226 69.164,5.436 v1(69.164,8.077)
MISO: R27.1 TP_MISO.1 U4.35 U6.3 | length 36.4
  Top Layer w0.254: U4.35 68.783,56.895 ; v1(71.628,50.698) 71.628,55.194 R27.1 70.104,56.49 69.698,56.895 68.783,56.895 ; U6.3 76.466,40.45 75.311,41.605 75.311,43.536 68.783,50.063 68.783,56.895
  Bottom Layer w0.254: v1(71.628,50.698) 71.765,50.698 72.299,50.165 v5(74.778,50.165)
NetC7_1: C7.1 J2.4 R9.2 R11.2 | length 19.5
  Bottom Layer w0.254: C7.1@93.04,13.284 R11.2 96.114,25.095 96.114,29.058 J2.4
NetC10_2: C10.2 J2.1 R12.1 R15.2 | length 21.5
  Bottom Layer w0.254: C10.2@78.969,13.868 78.93,13.906 78.93,17.64 78.892,17.678 78.892,22.123 81.026,22.123 86.766,27.864 J2.1
NetC25_1: C25.1 R30.1 R32.2 | length 21.6
  Top Layer w0.254: C25.1 58.229,35.623 58.801,35.052 64.288,35.052 66.091,33.249 66.091,28.829 R32.2
  Bottom Layer w0.254: R32.2 R30.1
NetC26_1: C26.1 R29.1 R31.2 | length 39
  Top Layer w0.254: C26.1 57.48,34.366 59.461,34.366 59.792,34.036 59.792,30.529 60.64,29.68 63.475,26.846 R31.2
  Bottom Layer w0.254: R31.2 63.475,23.47 64.186,24.181 74.524,24.181 75.336,24.994 R29.1
NetD2_1: HeartBeat.1 R1.1 | length 7.8
  Top Layer w0.254: HeartBeat.1 HeartBeat.1@59.817,10.226
  Top Layer w0.508: R1.1 59.182,10.861 HeartBeat.1@59.817,10.226
NetD3_1: R2.1 Shutdown.1 | length 7.7
  Top Layer w0.508: R2.1 51.625,16.894 52.045,16.475 52.045,9.847 Shutdown.1
NetD4_1: CanRx.1 R3.1 | length 7.6
  Top Layer w0.254: R3.1 R3.1@44.238,17.103 ; CanRx.1@44.238,9.948 CanRx.1
  Top Layer w0.508: CanRx.1@44.238,9.948 R3.1@44.238,17.103
NetD5_1: CanTx.1 R4.1 | length 7.6
  Top Layer w0.254: R4.1 R4.1@36.608,17.177 ; CanTx.1@36.608,9.874 CanTx.1
  Top Layer w0.508: CanTx.1@36.608,9.874 R4.1@36.608,17.177
NetD6_1: R5.1 Reset.1 | length 7.5
  Top Layer w0.254: R5.1 R5.1@28.977,17.251 ; Reset.1@28.977,9.8 Reset.1
  Top Layer w0.508: Reset.1@28.977,9.8 R5.1@28.977,17.251
NetD7_1: 5V.1 R6.1 | length 7.5
  Top Layer w0.254: 5V.1 5V.1@21.347,9.832 ; R6.1@21.347,17.219 R6.1
  Top Layer w0.508: 5V.1@21.347,9.832 R6.1@21.347,17.219
NetD8_1: 12V.1 R7.1 | length 7.5
  Top Layer w0.254: R7.1@13.716,17.145 R7.1
  Top Layer w0.508: R7.1@13.716,17.145 13.792,17.069 13.792,9.931 12V.1
NetF1_1: F1.1 J3.1 | length 15
  Top Layer w0.381: J3.1 16.205,54.051 17.28,55.126 F1.1@26.238,55.126
NetFL1_3: FL1.3 PulseTransformer1.2 R32.1 | length 5.2
  Top Layer w0.254: R32.1 66.832,21.184 ; PulseTransformer1.2 66.832,18.585 66.832,21.184 ; FL1.3 67.725,21.184 66.832,21.184
NetFL1_4: FL1.4 PulseTransformer1.1 R30.2 | length 5.5
  Top Layer w0.254: FL1.4@70.282,21.285 71.018,21.285 71.145,21.285 71.552,21.285 ; PulseTransformer1.1 71.552,21.285 ; R30.2 72.593,21.285 71.552,21.285
NetJ3_5: J3.5 R35.2 | length 76.6
  Bottom Layer w0.381: J3.5 13.665,51.39 13.888,51.613 17.303,51.613 18.415,50.501 18.415,47.015 19.609,45.822 30.048,45.822 32.14,43.729 64.38,43.729 65.106,44.456 71.126,44.456 77.826,51.156 R35.2
NetJ3_8: J3.8 R33.2 | length 57.8
  Bottom Layer w0.381: J3.8 9.83,41.885 5.486,46.228 5.258,46.457 5.258,61.646 8.026,64.414 13.848,64.414 14.072,64.638 14.072,68.555 16.815,71.298 27.234,71.298 27.457,71.075 R33.2
NetR17_1: R17.1 U3.1 | length 3.3
  Top Layer w0.254: U3.1 30.981,39.185 R17.1
NetR18_1: R18.1 R19.1 R20.2 | length 9.3
  Top Layer w0.305: R18.1 65.227,74.37 66.092,75.235 67.348,75.235 67.335,75.248 67.335,76.924 R20.2@67.323,76.937
NetR18_2: R18.2 U4.60 | length 17.6
  Top Layer w0.254: U4.60 57.372,66.541
  Top Layer w0.305: 57.372,66.541 57.887,67.056 57.887,72.669 58.369,73.152 63.29,73.152 65.253,75.114 65.253,76.708 R18.2
NetR21_1: R21.1 U6.16 | length 11.7
  Top Layer w0.254: R21.1 76.505,47.32 81.94,47.32 82.286,46.975 U6.16
NetR21_2: R21.2 R26.2 U6.15 | length 8
  Top Layer w0.254: U6.15 83.622,40.95 83.871,41.199 83.871,44.933 R26.2 83.883,45.021 83.883,47.434 R21.2
NetR22_1: R22.1 R23.1 U6.7 | length 5.9
  Top Layer w0.254: U6.7 78.949,38.45 79.174,38.225 79.174,38.214 80.137,37.251 80.137,35.928 R23.1@78.384,35.928
NetR24_1: R24.1 R25.1 U6.8 | length 5.1
  Top Layer w0.254: R24.1@74.828,34.328 74.876,34.328 75.328,34.78 75.328,34.96 75.477,35.108 76.023,35.108 76.172,35.257 76.172,35.605 76.495,35.928 76.632,35.928 76.632,37.718 76.859,37.945 77.089,37.945
NetR36_2: R36.2 U7.8 | length 4.1
  Top Layer w0.254: U7.8 95.58,47.955 R36.2
NetTP_CS_1: TP_CS.1 U4.33 U6.5 | length 27.8
  Top Layer w0.254: U4.33 67.334,55.895 67.742,55.487 67.742,50.939 ; TP_CS.1@65.888,48.412 TP_CS.1@65.888,49.237 ; TP_CS.1@66.04,49.237 67.742,50.939 ; U6.5 75.815,39.45 74.397,40.869 74.397,42.24 67.742,48.895 67.742,50.939
NetTP_MOSI_1: TP_MOSI.1 U4.36 U6.2 | length 37.2
  Top Layer w0.254: U4.36@64.805,57.408 68.021,57.408 68.068,57.455 71.534,57.455 72.466,56.523 72.466,47.015 75.768,43.713 75.768,41.834 76.652,40.95 ; U6.2 76.652,40.95 ; v1(79.883,45.187) 76.652,41.955 76.652,40.95
  Bottom Layer w0.254: v1(79.756,50.19) 79.819,50.127 79.819,45.25 v1(79.883,45.187)
NetTP_SCK_1: TP_SCK.1 U4.34 U6.4 | length 28.4
  Top Layer w0.254: U4.34 67.481,56.395 68.199,55.677 68.199,49.595 72.866,44.929 72.98,44.929 74.854,43.055 74.854,41.3 76.204,39.95 U6.4 ; TP_SCK.1 67.132,46.304 v1(67.246,46.419)
  Bottom Layer w0.254: v1@67.462,46.38 70.434,46.38 v5(70.924,46.87)
NetU4_17: U4.17
NetU4_20: U4.20 | length 0
  Top Layer w0.254: U4.20 U4.20@56.885,53.962
OSC_IN: C27.2 Crystal.2 U4.5 | length 31.2
  Top Layer w0.254: v2(50.775,63.525) 50.775,62.763 50.775,61.961 51.341,61.395 U4.5
  Bottom Layer w0.381: C27.2 34.22,73.742 43.155,73.742 43.155,73.663 Crystal.2 50.775,66.043 v2(50.775,63.525)
OSC_OUT: C28.2 Crystal.1 U4.6 | length 30.5
  Top Layer w0.254: v2(49.784,62.027) 49.784,61.265 50.154,60.895 U4.6
  Bottom Layer w0.254: v2@49.708,62.103 v2(49.784,62.027)
  Bottom Layer w0.381: C28.2 34.519,70.561 39.172,70.561 39.624,71.013 Crystal.1 39.675,72.365 42.291,72.365 43.586,71.069 43.586,62.814 44.298,62.103 v2@49.708,62.103
RESET: J1.10 U3.2 U4.7 U5.6 | length 102.2
  Top Layer w0.254: U3.2 38.125,36.982 37.973,37.135 37.973,44.327 38.452,44.806 v1(41.224,44.806) ; U4.7 55.863,60.395 55.997,60.528 v1(56.134,60.528) ; v2(74.295,56.388) 74.295,55.347 74.701,54.94 79.553,54.94 81.712,57.099 U5.6
  Bottom Layer w0.254: v1(41.224,44.806) 43.067,44.806 43.334,44.539 54.013,44.539 54.762,45.288 54.762,59.157 55.559,59.954 v1(56.134,60.528) 56.134,60.477 61.747,54.864 73.914,54.864 74.295,55.245 v2(74.295,56.388) 74.295,58.984 74.447,59.136 74.447,61.595 73.381,62.662 73.381,68.377 74.117,69.113 76.556,69.113 78.461,71.018 78.461,72.597 78.312,72.746 75.489,72.746 J1.10
RESET_FromBuff: R5.2 U5.14 | length 135.6
  Top Layer w0.254: U5.14@92.396,55.835 99.105,55.835 99.746,55.194 99.746,10.281 97.288,7.823 v1(96.469,7.823)
  Bottom Layer w0.254: R5.2 36.83,19.558 60.02,19.558 74.397,5.182 95.529,5.182 96.469,6.121 v1(96.469,7.823)
SHUTDOWN: J3.2 R2.2 U5.17 | length 176.6
  Top Layer w0.254: J3.2 22.53,46.965 ; v2(22.987,52.349) 22.987,52.212 22.53,51.755 22.53,46.965 ; v2(51.689,31.42) 50.19,29.921 24.863,29.921 24.714,30.07 24.714,44.78 22.53,46.965 ; U5.17@93.904,59.645 94.011,59.538 v2(95.656,59.538)
  Bottom Layer w0.254: v2(22.987,52.349) 21.615,53.721 21.615,56.363 23.089,57.836 28.042,57.836 28.664,58.458 28.664,75.806 30.302,77.445 49.663,77.445 50.4,76.708 52.191,76.708 52.407,76.924 53.511,76.924 53.606,76.829 53.817,76.829 55.118,78.13 89.433,78.13 92.1,75.463 92.1,63.094 v2(95.656,59.538) ; R2.2 51.657,27.464 51.657,31.388 v2(51.689,31.42)
SHUTDOWN_BUFF: U4.23 U5.3 | length 36.9
  Top Layer w0.254: U4.23 58.372,52.016 58.903,51.486 v1(60.223,51.486) ; v1(81.492,61.081) 81.578,60.995 83.836,60.995 U5.3
  Bottom Layer w0.254: v1(60.223,51.486) 60.3,51.486 60.808,51.994 75.061,51.994 76.505,53.438 76.505,61.403 76.748,61.646 80.928,61.646 v1(81.492,61.081)
SWCLK: J1.4 R14.2 U4.49 | length 20.2
  Top Layer w0.254: R14.2 62.869,69.211 62.869,65.318 U4.49
  Bottom Layer w0.254: R14.2 62.865,74.397 63.424,74.955 71.425,74.955 71.653,74.727 J1.4
SWDIO: J1.2 R8.1 U4.46 | length 22.2
  Top Layer w0.254: U4.46 68.945,62.395 70.176,61.164 70.176,59.755 R8.1@70.217,59.714
  Bottom Layer w0.254: R8.1@70.333,59.944 70.245,59.944 69.63,60.558 69.617,60.558 68.859,61.316 68.859,72.568 69.012,72.72 J1.2
VCC_3.3V: C5.2 C8.2 C12.2 C13.2 C14.2 C15.2 C16.2 C17.2 C18.2 C19.2 C22.2 C24.2 J1.1 Q1.3 Q2.3 R8.2 R17.2 R19.2 R27.2 U2.2 U4.13 U4.19 U4.32 U4.48 U4.64 U6.6 U7.5 | length 78.1
  Top Layer w0.254: R17.2@39.022,39.972 39.141,39.853 R17.2 ; C12.2@46.676,60.382 51.023,60.382 51.384,60.02 51.384,57.801 51.791,57.395 U4.13 ; U4.64 U4.64@55.385,65.328 ; U4.19 56.372,50.308 C16.2@56.413,50.267 ; C19.2 62.872,50.604 U4.32 ; U4.48 U4.48@64.805,63.408 ; C8.2@70.277,66.848 C8.2 ; C14.2@70.327,63.455 C14.2 C14.2@70.353,63.51 ; C22.2 72.974,41.504 75.54,38.938 U6.6@77.836,38.938 ; R8.2@77.775,60.223 R8.2 ; v1@90.747,44.171 v1(90.773,44.145)
  Top Layer w0.305: U4.64@55.385,65.328 55.385,67.526 56.159,68.301 56.159,70.333 C13.2 ; U4.48@64.805,63.408 C14.2@69.743,63.408 ; v2(67.107,73) 67.132,73.025 68.326,73.025 68.948,73.647 R19.2
  Top Layer w0.381: Q2.3 21,61.036 20.65,61.386 v2(20.65,65.735) 20.676,65.71 Q1.3 ; R17.2@39.116,39.827 R17.2@39.141,39.853 ; C14.2@70.327,63.455 73.787,59.995 R8.2@77.775,59.995 ; C14.2@70.353,63.51 C8.2@70.353,66.823
  Top Layer w0.508: v1(90.773,44.145) U7.5 C24.2
  Bottom Layer w0.254: C8.2@70.277,66.848 C8.2 ; J1.1 70.396,71.438 70.396,66.891 C8.2@70.409,66.878 ; R8.2@77.813,60.16 R8.2 ; R27.2 R27.2@77.838,56.502
  Bottom Layer w0.508: v2(89.637,53.67) 89.588,53.622 89.588,52.449 90.773,51.264 v1(90.773,44.145)
VCC_5V: C1.2 C9.2 C20.2 C21.2 C23.2 J2.2 R6.2 R22.2 R24.2 U1.3 U5.20 U6.9 U6.12 U7.3 | length 29.7
  Top Layer w0.254: C21.2 73.05,36.014 73.199,35.865 74.765,35.865 R24.2@74.828,35.928 ; R22.2 80.378,34.239 v2(82.728,34.239) ; 81.479,39.445 81.152,39.445 80.375,38.668 v2(80.375,38.536) 80.461,38.536 81.047,37.95 U6.9 ; C23.2@87.392,36.944 C23.2@88.062,36.944 ; C23.2 89.789,39.014 89.789,45.266 89.64,45.415 U7.3 ; U5.20@92.396,63.455 92.467,63.384 C20.2@100.751,63.384
pads on no net: J1.6 J1.7 J1.8 J3. J4. U3.3 U4.1 U4.2 U4.3 U4.4 U4.8 U4.9 U4.10 U4.11 U4.21 U4.24 U4.25 U4.26 U4.27 U4.28 U4.29 U4.30 U4.37 U4.38 U4.39 U4.40 U4.43 U4.50 U4.51 U4.52 U4.53 U4.54 U4.55 U4.56 U4.57 U4.58 U4.59 U4.61 U4.62 U5.11 U5.12 U5.13
copper on no net: | length 0
  Top Layer w0.254: 99.282,16.739 99.289,16.739

## Polygon pours and split planes (outlines as drawn)
GND on GROUND (split plane): 110.259,77.97 110.259,3.513 107.688,0.942 3.717,0.942 1.145,3.513 1.145,77.97 3.767,80.592 107.637,80.592
no net on POWER (split plane): 110.259,77.97 110.259,3.513 107.688,0.942 3.717,0.942 1.145,3.513 1.145,77.97 3.767,80.592 107.637,80.592
12V_Fused on POWER (split plane): 50.823,57.147 50.823,43.919 45.393,43.919 40.706,48.606 40.664,48.634 40.615,48.643 33.782,48.643 33.732,48.634 33.69,48.606 32.573,47.488 31.76,46.675 30.592,45.507 30.007,44.923 16.647,31.562 16.619,31.52 16.609,31.471 16.609,24.691 11.178,24.691 11.178,28.27 11.178,32.89 36.02,57.732 50.238,57.732
VCC_5V on POWER (split plane): 104.239,62.507 104.239,12.246 97.533,5.54 77.447,5.54 58.334,24.653 58.292,24.681 58.242,24.691 17.478,24.691 17.478,31.392 34.115,48.029 40.307,48.029 44.651,43.685 44.651,42.37 37.211,42.37 37.161,42.36 37.119,42.332 37.091,42.29 37.082,42.24 37.082,37.211 37.091,37.161 37.119,37.119 37.161,37.091 37.211,37.082 46.149,37.082 46.149,31.852 46.159,31.802 46.187,31.76 47.483,30.465 47.525,30.437 47.574,30.427 69.469,30.427 69.519,30.437 69.561,30.465 70.348,31.252 70.376,31.294 70.386,31.344 70.386,39.748 70.412,39.774 75.943,39.774 76.007,39.71 76.049,39.682 76.098,39.672 76.148,39.682 76.19,39.71 76.218,39.752 76.228,39.802 76.228,43.409 76.218,43.458 76.19,43.5 76.165,43.526 76.123,43.554 76.073,43.563 70.411,43.563 70.411,48.892 70.424,48.905 72.012,50.493 93.675,50.493 93.725,50.503 93.767,50.531 95.113,51.877 95.141,51.919 95.151,51.968 95.151,65.25 101.496,65.25
VCC_3.3V on POWER (split plane): 32.56,72.339 32.57,72.29 32.598,72.248 32.64,72.22 32.69,72.21 64.287,72.21 64.337,72.22 64.379,72.248 67.11,74.978 90.879,74.978 90.879,51.387 71.857,51.387 71.807,51.377 71.765,51.349 69.708,49.291 69.68,49.249 69.67,49.2 69.67,42.901 69.68,42.851 69.708,42.809 69.75,42.781 69.799,42.771 75.334,42.771 75.334,40.439 70.155,40.439 70.105,40.429 70.063,40.401 69.733,40.071 69.705,40.029 69.695,39.98 69.695,35.283 69.39,34.978 52.276,34.978 51.768,35.487 51.768,37.694 51.758,37.743 51.73,37.785 51.688,37.813 51.638,37.823 37.848,37.823 37.848,41.704 51.638,41.704 51.688,41.714 51.73,41.742 51.758,41.784 51.768,41.834 51.768,46.05 51.768,57.277 51.758,57.327 51.73,57.369 50.46,58.639 50.418,58.667 50.368,58.676 16.258,58.676 16.258,76.452 32.56,76.452

## Other copper
POWER (plane layer: these items are gaps in the copper):
  lines w0.254: 51.638,41.859 51.638,41.834 ; 70.256,48.92 71.958,50.622 ; 70.282,48.946 70.282,43.434 76.073,43.434 76.098,43.409 76.098,39.802 75.997,39.903 70.358,39.903 70.256,39.802 70.256,31.344 69.469,30.556 47.574,30.556 46.279,31.852 46.279,37.211 37.211,37.211 37.211,42.24 44.78,42.24 44.78,43.739 40.361,48.158 37.414,48.158 34.061,48.158 17.348,31.445 17.348,24.562 25.552,24.562 28.6,24.562 58.242,24.562 77.394,5.41 97.587,5.41 104.369,12.192 104.369,62.56 101.549,65.38 95.021,65.38 95.021,51.968 93.675,50.622 82.271,50.622 71.958,50.622 ; 70.333,48.997 71.958,50.622 ; 51.638,41.834 37.719,41.834 37.719,37.694 51.638,37.694 51.638,35.433 52.222,34.849 69.444,34.849 69.825,35.23 69.825,39.98 70.155,40.31 75.489,40.31 75.463,40.335 75.463,42.901 69.799,42.901 69.799,49.2 71.857,51.257 72.822,51.257 90.881,51.257 91.008,51.257 91.008,75.108 76.479,75.108 68.631,75.108 67.056,75.108 64.287,72.339 55.855,72.339 41.732,72.339 32.69,72.339 32.69,76.581 22.2,76.581 16.129,76.581 16.129,58.547 22.2,58.547 32.69,58.547 50.368,58.547 51.638,57.277 51.638,46.05 51.638,41.834 ; 11.049,24.562 16.739,24.562 16.739,31.471 30.099,44.831 30.683,45.415 31.852,46.584 32.664,47.396 33.782,48.514 36.728,48.514 40.615,48.514 45.339,43.79 50.952,43.79 50.952,57.201 50.292,57.861 35.966,57.861 11.049,32.944 11.049,28.27 11.049,24.562

## Silkscreen, mask and mechanical layers (free items; w line width, h text height)
Top Overlay:
  drawing of 23 lines, arcs and shapes, not listed
  text "Masterboard RevC / 4/8/21" at 80.721,67.488 h1.91
Mechanical 1:
  the board outline again, w1.2
BOARD:
  lines w0.254: 4.14,5.41 4.14,76.886 6.477,79.223 103.861,79.223 105.232,79.223 107.62,76.835 107.62,5.425 105.218,3.023 6.528,3.023 4.14,5.41

## Text inside footprints (layer, text, board x,y; h text height)
C3: Top Overlay "+" at 43.552,47.358 h1.52
J1: Top Overlay "10" at 77.622,72.466 h1.27; Top Overlay "9" at 77.826,70.053 h1.27; Top Overlay "2" at 67.69,72.263 h1.27; Top Overlay "1" at 67.69,70.637 h1.27; Mechanical 13 "2" at 67.69,72.263 h1.27; Mechanical 13 "1" at 67.69,70.637 h1.27